# Altium PCB RPIShield_Rev1.PcbDoc
Units mil, origin at the board's own origin, x right, y up, seen from the top; angles counter-clockwise.
Board outline 2585 x 2220 mil, 2 copper layers (Top Layer, Bottom Layer); 27 components, 25 nets, 152 pads, 5 vias.
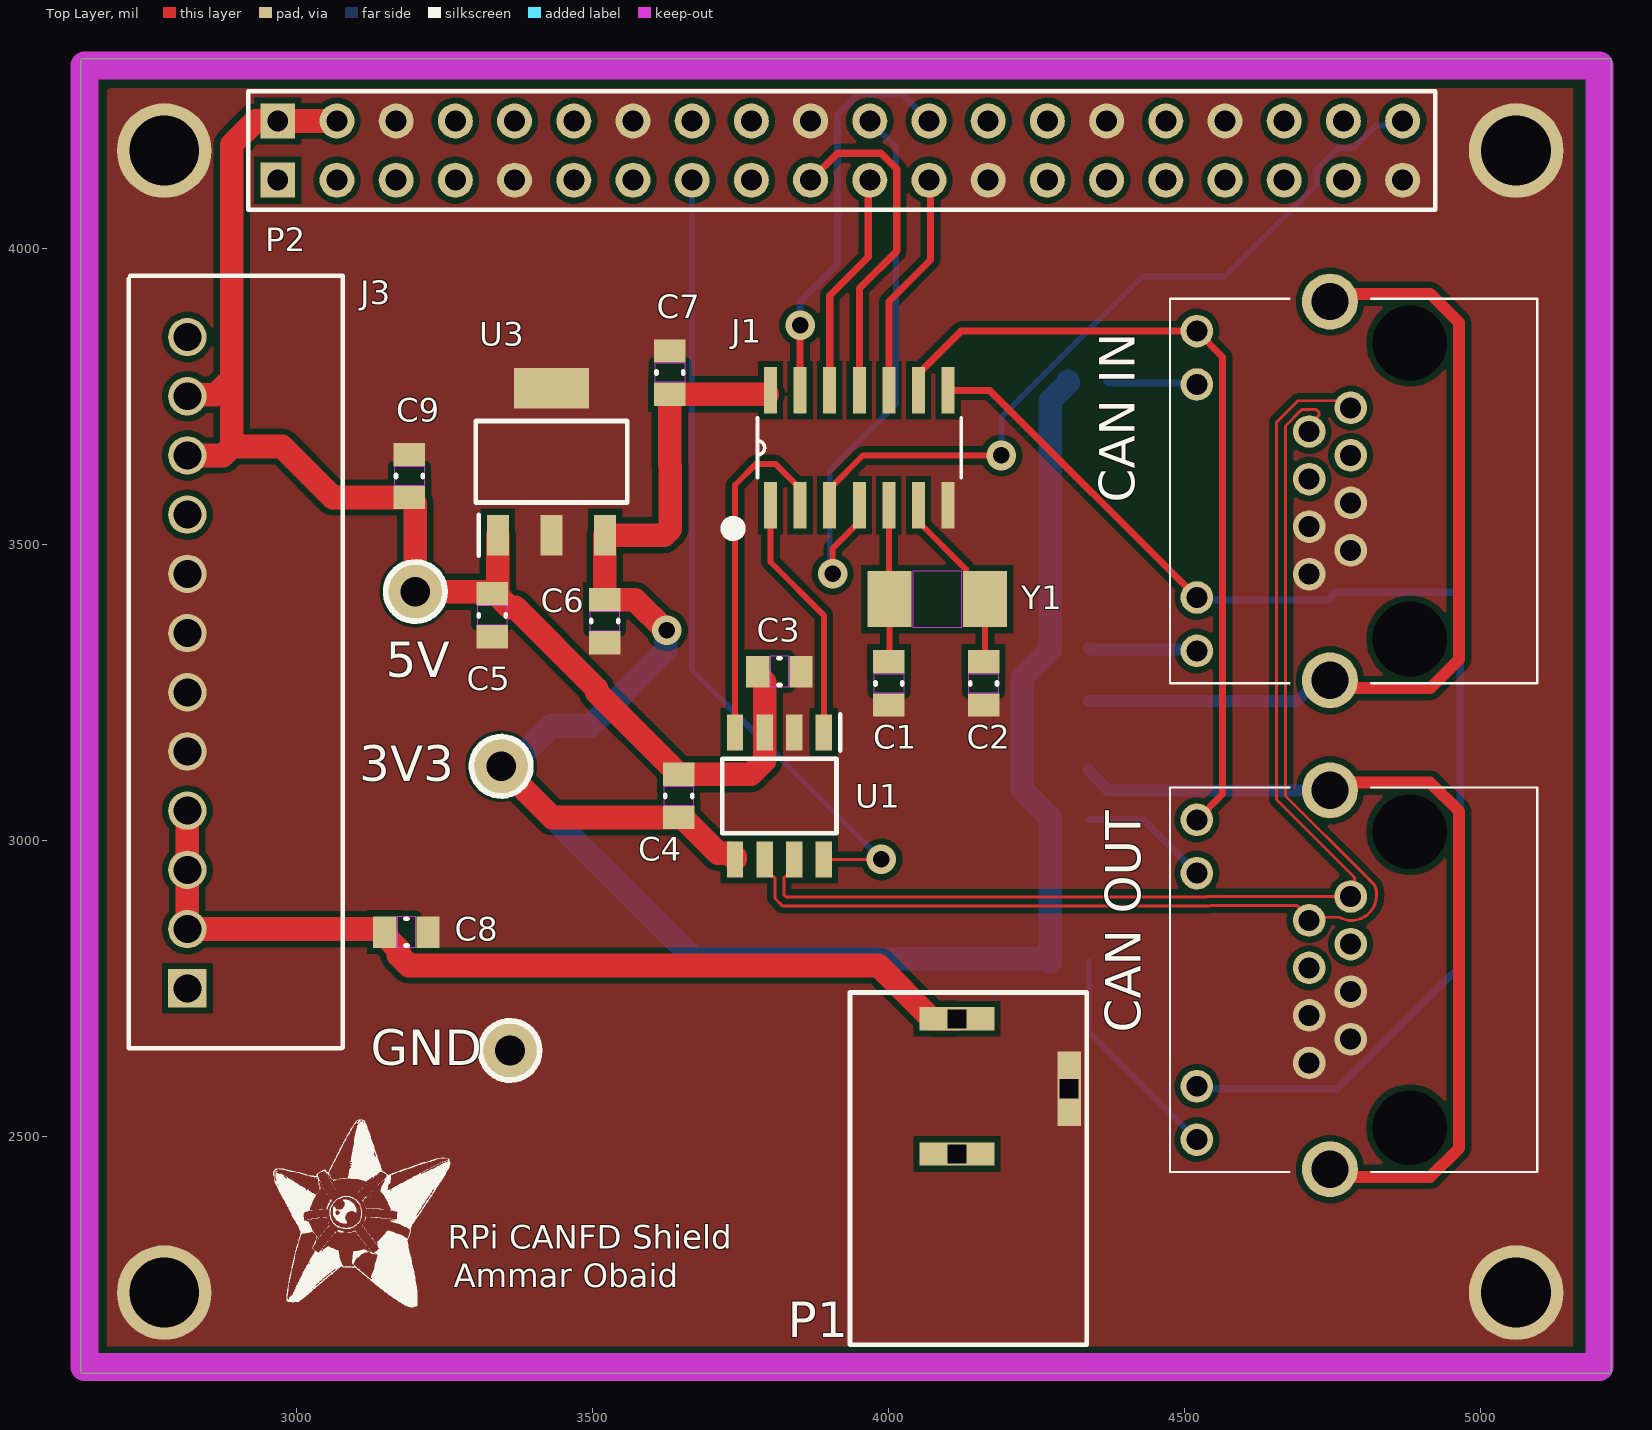
[diagram p0: Top Layer view]
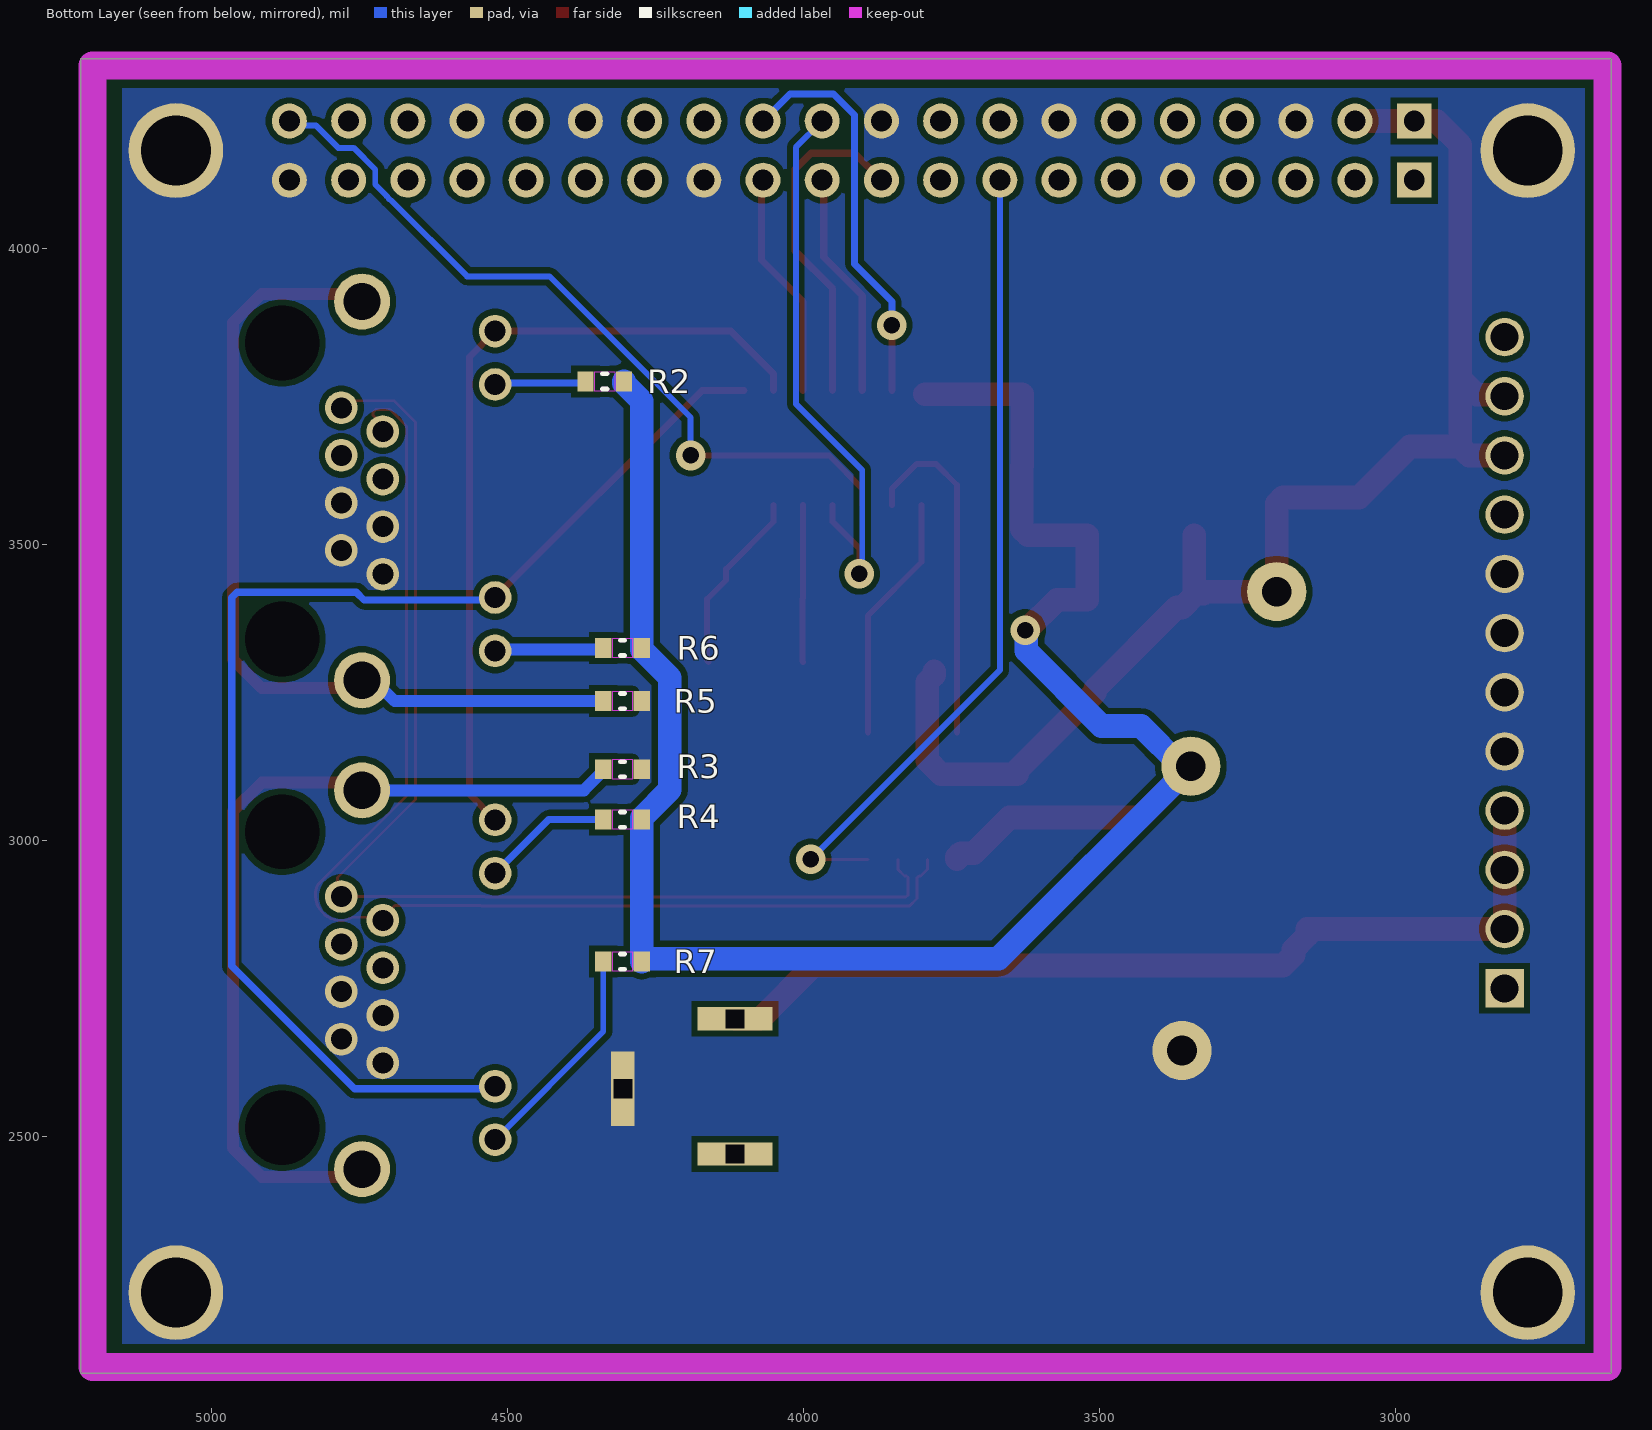
[diagram p1: Bottom Layer view, seen from below]
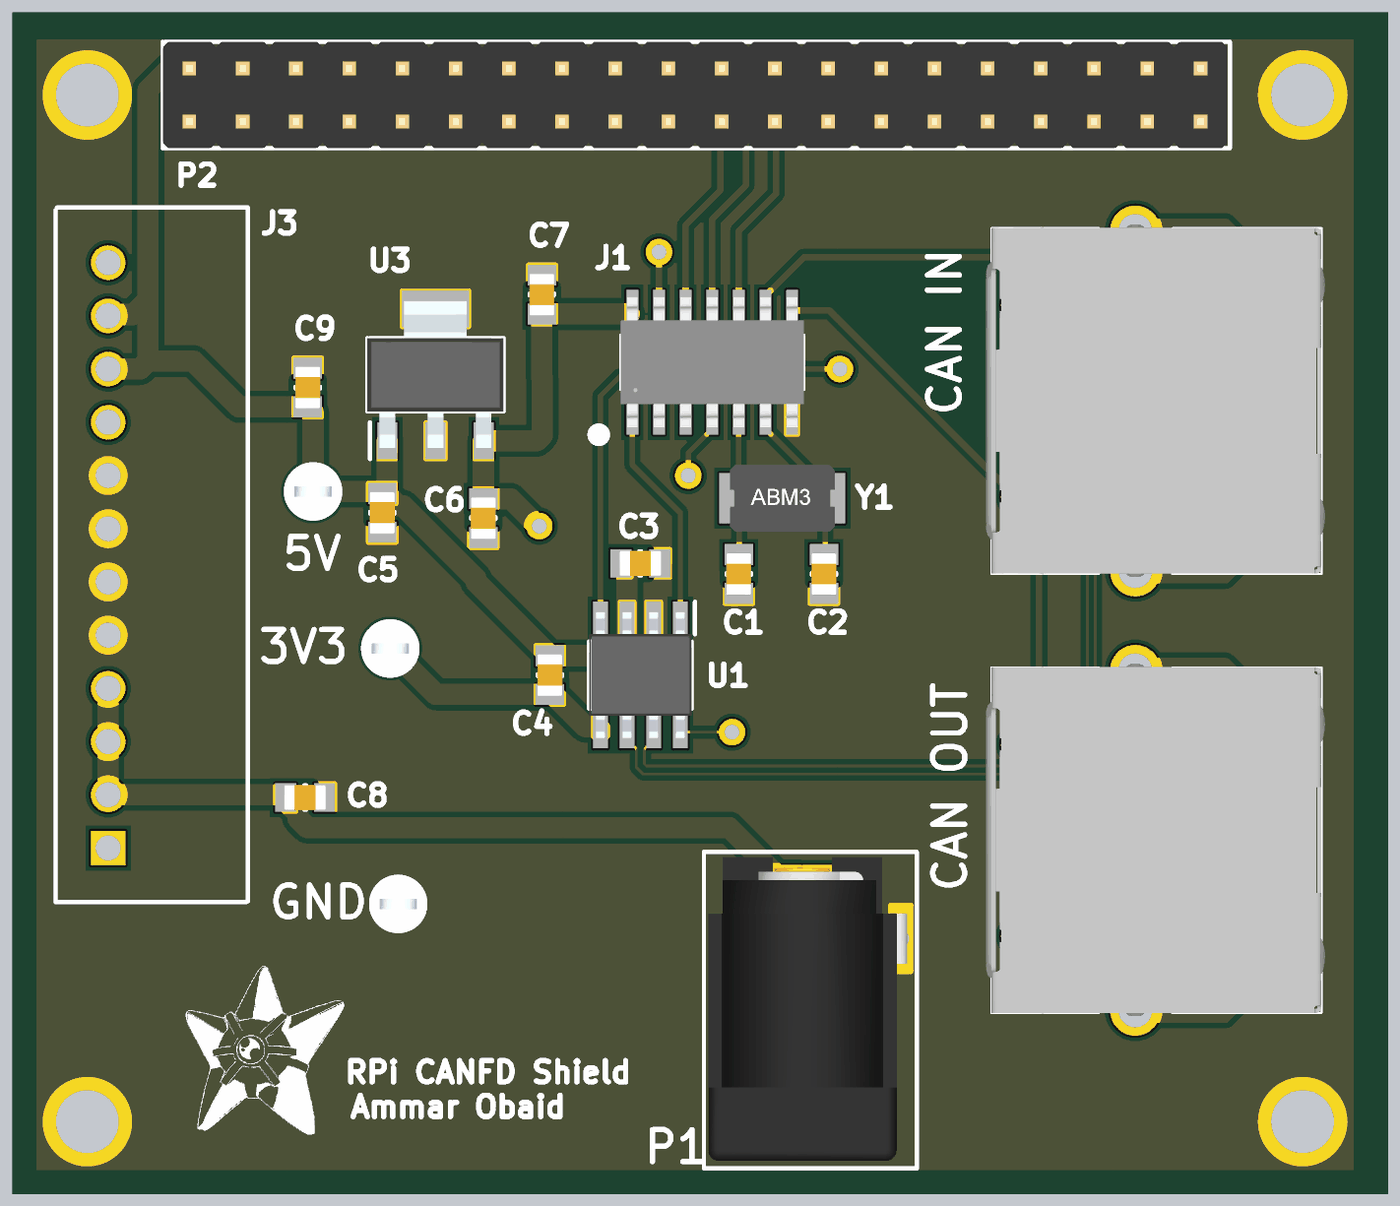
[diagram p2: 3D render of the assembled board from above, using the file's embedded part models]
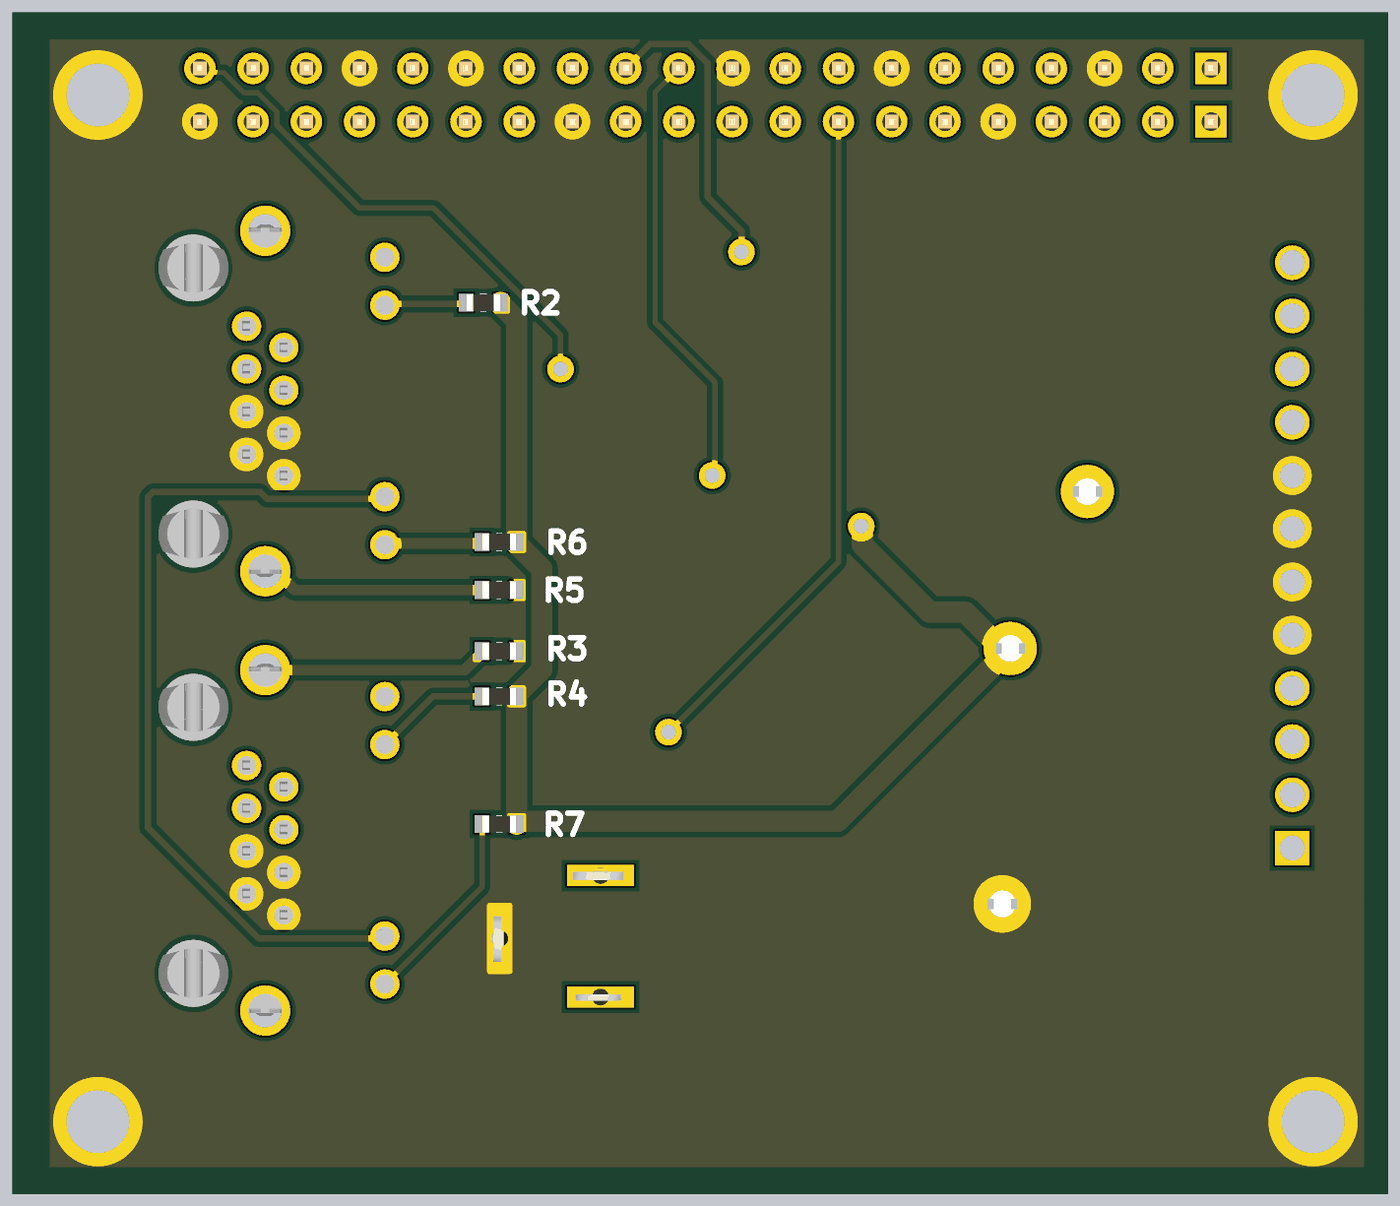
[diagram p3: 3D render of the assembled board from below, using the file's embedded part models]

## Layer stack, top to bottom
Top Solder: solder mask 0.4, Solder Resist, Dk 3.5
Top Layer: signal copper 1.4
Dielectric 1: dielectric 12.6, FR-4, Dk 4.8
Bottom Layer: signal copper 1.4
Bottom Solder: solder mask 0.4, Solder Resist, Dk 3.5

## Board outline
2635,2100 2635,4320 5220,4320 5220,2100

## Design rules (kind name [scope] priority, off if disabled: settings)
Clearance [All] p1: gap=10 ignorepadtopadclearanceinfootprint=FALSE except(0: Arc-Hole Track-Hole SMDPad-Hole THPad-Hole Via-Hole Fill-Hole Poly-Hole Region-Hole Text-Hole)
DiffPairsRouting [All] p1: maxlimit=10 minlimit=10 mostfreqgap=10 toplayer_minwidth=5 toplayer_maxwidth=15 toplayer_prefwidth=15 bottomlayer_minwidth=5 bottomlayer_maxwidth=15 bottomlayer_prefwidth=15 maxuncoupledlength=500
PolygonConnect PolygonConnect_2 [All vs IsNamedPolygon('GND_L02_P004')] p1: connectstyle=Direct reliefconductorwidth=10 reliefentries=4 polygonreliefangle="90 Angle" airgapwidth=10
PolygonConnect Relief_Top [All vs IsNamedPolygon('GND_L01_P005')] p2: connectstyle=Direct reliefconductorwidth=10 reliefentries=4 polygonreliefangle="90 Angle" airgapwidth=10
PolygonConnect PolygonConnect_1 [All vs IsNamedPolygon('GND_L01_P005')] p3: thpad.connectstyle=Direct thpad.reliefconductorwidth=10 thpad.reliefentries=4 thpad.polygonreliefangle="90 Angle" thpad.airgapwidth=10 smdpad.connectstyle=Direct smdpad.reliefconductorwidth=10 smdpad.reliefentries=4 smdpad.polygonreliefangle="90 Angle" smdpad.airgapwidth=10 via.connectstyle=Relief via.reliefconductorwidth=10 via.reliefentries=4 via.polygonreliefangle="90 Angle" via.airgapwidth=10
PolygonConnect [All] p4: connectstyle=Relief reliefconductorwidth=10 reliefentries=4 polygonreliefangle="90 Angle" airgapwidth=10
RoutingVias [All] p1: holewidth=28 width=50 viastyle="Through Hole" minholewidth=28 minwidth=50 maxholewidth=28 maxwidth=50
SolderMaskExpansion [All] p1: expansion=4 istentingtop=FALSE
Width [All] p1: maxlimit=40 minlimit=5 preferedwidth=10 minimp=50.000000 maximp=50.000000 favimp=50.000000
29 further rules are at their usual default settings.

## Classes and differential pairs
differential pair CAN: +CAN_P -CAN_N

## Components (designator, comment, footprint, x,y, rotation, side; value= is the part's Value field where it differs from the comment)
3V3 "Test Point" "Test Point - 5002" 3345,3125 r0 top (schematic designator TP3)
5V "Test Point" "Test Point - 5002" 3200,3420 r0 top (schematic designator TP2)
C1 "Capacitor - Nonpolarized" "0805 - Capacitor" 4000,3265 r90 top value=27pF
C2 "Capacitor - Nonpolarized" "0805 - Capacitor" 4160,3265 r90 top value=27pF
C3 "Capacitor - Nonpolarized" "0805 - Capacitor" 3815,3285 r180 top value=100nF
C4 "Capacitor - Nonpolarized" "0805 - Capacitor" 3645,3075 r270 top value=100nF
C5 "Capacitor - Nonpolarized" "0805 - Capacitor" 3330,3380 r270 top value=1uF
C6 "Capacitor - Nonpolarized" "0805 - Capacitor" 3520,3370 r90 top value=1uF
C7 "Capacitor - Nonpolarized" "0805 - Capacitor" 3630,3790 r270 top value=100nF
C8 "Capacitor - Nonpolarized" "0805 - Capacitor" 3185,2845 r0 top value=10uF
C9 "Capacitor - Nonpolarized" "0805 - Capacitor" 3190,3615.32 r270 top value=22uF
"CAN IN" "MTJ-88ARX1-FSM-LV" MTJ-88ARX1-FSM-LV 4790,3600.55 r90 top (schematic designator *1)
"CAN OUT" "MTJ-88ARX1-FSM-LV" MTJ-88ARX1-FSM-LV 4790,2775 r90 top (schematic designator *)
GND "Test Point" "Test Point - 5002" 3360,2645 r0 top (schematic designator TP1)
J1 "MCP2517FD" MCP2517FD 3955.67,3668.35 r90 top
J3 "K7805-3AR3" K7805-3AR3 2815,2750 r90 top
P1 "694106301002 Barrel Connector" 694106301002 4115,2698.35 r90 top
P2 "2x20 Header" HDR2X20 2967.68,4115 r0 top
R2 "Resistor" "0603 - Resistor" 4335,3775 r180 bottom value=230
R3 "Resistor" "0603 - Resistor" 4305,3120 r0 bottom value=DNP
R4 "Resistor" "0603 - Resistor" 4305,3035 r180 bottom value=230
R5 "Resistor" "0603 - Resistor" 4305,3235 r0 bottom value=DNP
R6 "Resistor" "0603 - Resistor" 4305,3325 r180 bottom value=230
R7 "Resistor" "0603 - Resistor" 4305,2795 r180 bottom value=230
U1 "TJA1051T_3,118" "TJA1051T/3,118 - duplicate" 3815,3075 r270 top
U3 "MCP1755" MCP1755ST 3268.58,3420.83 r90 top
Y1 "Oscillator" "2-SMD NO LEAD CRSYSTAL" 4081.65,3407.24 r0 top value=16MHz

## Footprints (in the part's own frame and the unit in brackets; to place one, negate y for a bottom-side part, rotate by r counter-clockwise, add the part's x,y. Pads: shape width x height; smd on the part's side, far side on the other; paste and mask are expansions set on the pad)
"2-SMD NO LEAD CRSYSTAL" [mm]
  rect 1.9x2.4 smd: 1(-2.05,0) 2(2.05,0)
  Top Layer keep-out region: -1.05,1.2 -1.05,-1.2 1.05,-1.2 1.05,1.2
  body extent -2.5,-1.6 2.5,1.6, height 1.3
"0603 - Resistor" [mm] "0603 Chip Resistor - IPC Medium Density"
  rect 0.7x0.85 smd: 1(-0.825,0) 2(0.825,0)
  Top Layer keep-out region: -0.45,0.4 -0.45,-0.4 0.45,-0.4 0.45,0.4
  silkscreen extent -0.1,-0.33 0.1,0.33, body extent -0.8,-0.4 0.8,0.4, height 0.45
"0805 - Capacitor" [mm] "0805 Chip Capacitor - IPC Medium Density"
  rect 1x1.35 smd: 1(-0.925,0) 2(0.925,0)
  Top Layer keep-out region: -0.4,0.65 -0.4,-0.65 0.4,-0.65 0.4,0.65
  silkscreen extent -0.05,-0.58 0.05,0.58, body extent -1,-0.6 1,0.6, height 1.2
694106301002 [mm] "Power Barrel Connector Jack 2.10mm ID (0.083\"), 5.50mm OD (0.217\") Through Hole, Right Angle"
  rect 1x3.2 hole 0.8 square: 1(0,0) 2(-5.8,0)
  rect 3.2x1 hole 0.8 square: 3(-3,-4.809)
  silkscreen extent -13.98,-5.57 1.13,4.59, body extent -13.62,-5.11 0.88,4.39, height 13.35
HDR2X20 [mm] "Connector; Header; 40 Position"
  rect 1.5x1.5 hole 0.9: 1(0,0) 40(0,2.54)
  round 1.5 hole 0.9: 2(2.54,0) 3(5.08,0) 4(7.62,0) 5(10.16,0) 6(12.7,0) 7(15.24,0) 8(17.78,0) 9(20.32,0) 10(22.86,0) 11(25.4,0) 12(27.94,0) 13(30.48,0) 14(33.02,0) 15(35.56,0) 16(38.1,0) 17(40.64,0) 18(43.18,0) 19(45.72,0) 20(48.26,0) 21(48.26,2.54) 22(45.72,2.54) 23(43.18,2.54) 24(40.64,2.54) 25(38.1,2.54) 26(35.56,2.54) 27(33.02,2.54) 28(30.48,2.54) 29(27.94,2.54) 30(25.4,2.54) 31(22.86,2.54) 32(20.32,2.54) 33(17.78,2.54) 34(15.24,2.54) 35(12.7,2.54) 36(10.16,2.54) 37(7.62,2.54) 38(5.08,2.54) 39(2.54,2.54)
  silkscreen extent -1.27,-1.27 49.66,3.81, body extent -1.27,-1.27 49.53,3.81, height 8.54
K7805-3AR3 [mm] "Non-Isolated PoL Module DC DC Converter 1 Output 5V 3A 8V - 36V Input"
  rect 1.65x1.65 hole 1.2: 1(0,0)
  round 1.65 hole 1.2: 2(2.54,0) 3(5.08,0) 4(7.62,0) 5(10.16,0) 6(12.7,0) 7(15.24,0) 8(17.78,0) 9(20.32,0) 10(22.86,0) 11(25.4,0) 12(27.94,0)
  silkscreen extent -2.58,-6.67 30.57,2.51
MCP1755ST [mm] "Load Drop Voltage Regulator"
  rect 1.75x0.95 smd: 1(2.4,-1.8) 2(2.4,-4.1) 3(2.4,-6.4)
  rect 1.75x3.2 smd: 2(8.7,-4.1)
  silkscreen extent 1.52,-7.35 7.3,-0.85, body extent 2.05,-7.35 9.05,-0.85, height 1.8
MCP2517FD [mil] "CANbus Controller CAN 2.0 SPI Interface 14-SOIC"
  rect 78x22 smd: 1(-102.35,155.67) 2(-102.35,105.67) 3(-102.35,55.67) 4(-102.35,5.67) 5(-102.35,-44.33) 6(-102.35,-94.33) 7(-102.35,-144.33) 8(91.65,-144.33) 9(91.65,-94.33) 10(91.65,-44.33) 11(91.65,5.67) 12(91.65,55.67) 13(91.65,105.67) 14(91.65,155.67)
  silkscreen extent -152,-166 46,229, body extent -127,-166 117,178, height 69
MTJ-88ARX1-FSM-LV [mm] "RJ45 Connector"
  round 1.4 hole 0.9: 1(3.302,0.254) 2(2.282,2.034) 3(1.262,0.254) 4(0.242,2.034) 5(-0.778,0.254) 6(-1.798,2.034) 7(-2.818,0.254) 8(-3.838,2.034) 9(6.592,6.854) 10(4.302,6.854) 11(-4.838,6.854) 12(-7.128,6.854)
  round 2.4 hole 1.6: MH1(7.857,1.144) MH2(-8.393,1.144)
  round 1.6 hole 3.2 unplated: MH3(6.082,-2.286) MH4(-6.618,-2.286)
  silkscreen extent -8.52,-7.75 7.98,8, body extent -8.65,-7.91 8.15,8.26, height 12.95
"Test Point - 5002" [mil] "5002 - PCB TEST POINT WHITE .040"
  round 100 hole 50: 1(0,0)
  silkscreen extent -50,-50 50,50, body extent -50,-50 50,50, height 180
"TJA1051T/3,118 - duplicate" [mm] "SOIC127P600X175-8N"
  rect 1.55x0.7 smd: 1(-2.725,1.905) 2(-2.725,0.635) 3(-2.725,-0.635) 4(-2.725,-1.905) 5(2.725,-1.905) 6(2.725,-0.635) 7(2.725,0.635) 8(2.725,1.905)
  silkscreen extent -3.5,-2.45 1.6,2.61, body extent -3,-2.45 3,2.45, height 1.75

## Part data
C1 C2: "Nonpolarized Capacitor", Manufacturer=Yageo, Manufacturer Part Number=CC0805JRNPO9BN270, Supplier Part Number=311-1104-1-ND, Supplier=Digikey
C3 C4 C7: "Nonpolarized Capacitor", Manufacturer=Yageo, Manufacturer Part Number=CC0805KRX7R8BB104, Supplier Part Number=311-1141-1-ND, Supplier=Digikey
C5 C6 C8 C9: "Nonpolarized Capacitor", Manufacturer=Yageo, Manufacturer Part Number=CC0805KFX7R6BB106, Supplier Part Number=13-CC0805KFX7R6BB106CT-ND, Supplier=Digikey
"CAN IN" "CAN OUT": "RJ45 Connector"
J1: "CANbus Controller CAN 2.0 SPI Interface 14-SOIC", Manufacturer Name="Microchip Technology", Manufacturer Part Number=MCP2517FDT-H/SL, Supplier Part Number=MCP2517FDT-H/SLTR-ND, Datasheet=https://ww1.microchip.com/downloads/en/DeviceDoc/MCP2517FD-External-CAN-FD-Controller-with-SPI-Interface-20005688B.pdf, Supplier=Digikey
J3: "Non-Isolated PoL Module DC DC Converter 1 Output 5V 3A 8V - 36V Input", Manufacturer Name="Mornsun America, LLC", Supplier Part Number=2725-K7805-3AR3-ND, Datasheet=https://www.mornsun-power.com/html/pdf/K7803-3AR3.html, Manufacturer Part Number=K7805-3AR3, Supplier=Digikey
P1: "CONN PWR JACK 2.1X5.5MM SOLDER", Manufacturer="Würth Elektronik", Manufacturer Part Number=694106301002, Supplier Part Number=732-5930-ND, Datasheet=https://www.we-online.com/katalog/datasheet/6941xx301002.pdf, Supplier=Digikey
P2: "2x20 Pin Header"
R2 R3 R4 R5 R6 R7: Manufacturer=Yageo, Manufacturer Part Number=RC0603FR-0710KL, Supplier Part Number=311-10.0KHRCT-ND, Supplier=Digikey
U1: "CAN Transceiver IC 4.5V-5.5V 250ns", Manufacturer=NXP, Manufacturer Part Number=TJA1051T/3,118, Supplier Part Number=568-8684-1-ND, ComponentLink1Description=Datasheet, ComponentLink1URL=http://www.nxp.com/docs/en/data-sheet/TJA1051.pdf, Supplier=Digikey
U3: library part MCP1755ST, "Linear Regulator 300mA", Manufacturer=Microchip, ComponentLink1Description=Datasheet, ComponentLink1URL=http://ww1.microchip.com/downloads/en/devicedoc/25160a.pdf, Supplier=Digikey
Y1: "Crystal Oscillator", Manufacturer="Abracon LLC", Manufacturer Part Number=ABM7-16.000MHZ-4-T, Supplier Part Number=535-13460-1-ND, Supplier=Digikey

## Free pads (board coordinates)
  round 160 hole 118.11: ""(2775.94,2235.87) ""(2775.94,4165) ""(5059.41,2235.87) ""(5059.41,4165)

## Via types
v1: diameter 50, hole 28, Top Layer to Bottom Layer, 5 vias

## Nets (pads, with @x,y where several pads share a name; then routed paths per layer and width w, separated by ;. In a path a pad name is that pad's centre, name@x,y a point inside that pad or via, vN(x,y) a via of type N, cw(c..) or ccw(c..) an arc to the next point about the centre after c; other vN are vias at no path point)
+3.3V: 3V3.1 C4.2 C6.2 C7.2 J1.14 R2.2 R4.2 R6.2 R7.2 U1.5 U3.3 | length 3695.3
  Top Layer w40: 3V3.1 3431.42,3038.58 C4.2 3651.26,3038.58 3711.61,2978.23 3733.78,2978.23 3740,2972.01 U1.5 ; v1(3625,3355) 3622.29,3355 3571.19,3406.1 3520.31,3406.1 C6.2 3520,3514.76 U3.3 3620.32,3515.32 3630.86,3525.86 3630.86,3631.95 3630,3632.81 C7.2 J1.14@3794,3753.58
  Bottom Layer w40: v1(3625,3355) 3623.09,3353.09 3623.09,3320.3 3495.83,3193.05 3429.28,3193.05 3361.24,3125 3V3.1 3670,2800 4267.52,2800 R7.2 R4.2 4272.52,3037.95 4225,3085.47 4225,3274.53 4272.52,3322.05 R6.2 4272.52,3742.05 4302.52,3772.05 R2.2
+5V: 5V.1 C3.2 C4.1 C5.1 C9.2 J3.10 J3.11 P2.39 P2.40 U1.3 U3.1 | length 2354.7
  Top Layer w40: J3.10 2875,3650 2890,3665 ; J3.11 2817.48,3752.48 2862.48,3752.48 2890,3780 ; P2.39 P2.40 2930,4215 2890,4175 2890,3780 ; U3.1 3339.45,3419.61 C5.1@3336.26,3416.42 ; C4.1 3638.74,3111.42 3638.43,3111.73 3638.43,3117.99 3506.24,3250.18 3506.24,3256.03 3369,3393.27 3359.41,3393.27 C5.1@3336.26,3416.42 ; C4.1@3651.57,3111.42 3766.57,3111.42 3790,3134.85 3790,3267.32 3778.58,3278.74 C3.2 ; 2890,3665 2975,3665 3061.1,3578.9 C9.2 3200,3568.9 5V.1 3320.16,3420 3323.74,3416.42 C5.1 C5.1@3336.26,3416.42 ; 2890,3665 2890,3780
+21.1V: C8.1 J3.2 J3.3 J3.4 P1.1 | length 1574.8
  Top Layer w40: J3.4 J3.3 J3.2 3148.27,2850 3148.58,2849.69 C8.1 3148.58,2838.74 3171.73,2815.59 3171.73,2806 3189.31,2788.43 3982.24,2788.43 4072.32,2698.35 P1.1
\I\N\T\: J1.4 P2.30 | length 966.6
  Top Layer w10: v1(3905,3450) 3905,3493 3950,3538 J1.4
  Bottom Layer w10: v1(3905,3450) 3900,3455 3900,3625 4012.2,3737.2 4012.2,4170.47 P2.30
C\S\: J1.13 P2.29 | length 679.2
  Top Layer w12: J1.13 v1(3850,3870)
  Bottom Layer w12: v1(3850,3870) 3850,3910 3913.2,3973.2 3913.2,4224.91 3948.82,4260.53 4022.15,4260.53 P2.29
CAN_G_LED: "CAN IN.11" "CAN OUT.11" J1.8 | length 2175.7
  Top Layer w12: J1.8 4170.24,3760 4520.16,3410.08
  Bottom Layer w12: 4520.16,2584.53 4524.35,2580.34 4757.89,2580.34 4965,2787.45 4965,3410 4956.01,3418.99 4754.59,3418.99 4741.49,3405.89 4524.35,3405.89 4520.16,3410.08
CAN_N: "CAN IN.2" "CAN OUT.2" U1.6 | length 2102.3
  Top Layer w5: U1.6 3790,2950.98 3801.28,2939.7 3804.57,2939.7 3807.5,2936.78 3807.5,2901.72 3819.9,2889.31 4542.96,2889.31 4543.65,2890 4689.64,2890 4709.66,2869.98 4715.06,2869.98 ; 4709.92,2864.84 4715.06,2869.98 ; 4709.92,3690.39 4709.92,3701.59 4726.71,3718.38 4726.71,3722.52 4721.79,3727.44 4697.39,3727.44 4669.86,3699.92 4669.86,3074.94 4801.41,2943.39 ; 4801.43,2943.37 4819.71,2925.09 cw(c4781.19,2907.14) 4821.75,2919.82 cw(c4781.19,2907.14) 4784.03,2864.73 cw(c4781.19,2907.14) 4782.87,2864.67 cw(c4782.69,2869.66) 4782.46,2864.67 ccw(c4780,2824.68) 4778.72,2864.72 cw(c4778.6,2869.72) 4778.31,2864.73 cw(c4781.19,2907.14) 4777.13,2864.83 cw(c4781.19,2907.14) 4760.55,2869.98 4715.06,2869.98
CAN_P: "CAN IN.1" "CAN OUT.1" U1.7 | length 2031.7
  Top Layer w5: U1.7 3840,2950.98 3828.72,2939.7 3825.43,2939.7 3822.5,2936.78 3822.5,2907.93 3826.12,2904.31 4536.75,2904.31 4537.44,2905 4780,2905 4786.46,2911.46 4786.46,2937.13 4654.86,3068.72 4654.86,3706.13 4691.18,3742.44 4754.55,3742.44 4766.44,3730.55 4780,3730.55
CAN_Y_LED: "CAN IN.9" "CAN OUT.9" J1.9 | length 1389.7
  Top Layer w12: J1.9 4050,3788 4122.08,3860.08 4520.16,3860.08 4563.72,3816.52 4563.72,3078.09 4520.16,3034.53
CANRX: J1.2 U1.4 | length 587.9
  Top Layer w10: U1.4 3740,3600 3775.86,3635.86 3808.14,3635.86 3850,3594 J1.2
CANTX: J1.1 U1.1 | length 421
  Top Layer w10: J1.1 3800,3470 3890,3380 U1.1
CLKOUT: J1.3 P2.21 | length 1305.4
  Top Layer w10: J1.3 3900,3594 3956,3650 v1(4190,3650)
  Bottom Layer w10: v1(4190,3650) 4190,3714.21 4428.28,3952.49 4567.49,3952.49 4694.33,4079.33 ccw(c4667.68,4115) 4703.35,4088.35 4722.68,4107.68 4722.68,4132.97 4759.23,4169.53 4785.18,4169.53 4823.15,4207.5 4860.18,4207.5 P2.21
GND: "CAN IN.5" "CAN IN.6" "CAN IN.7" "CAN IN.8" "CAN OUT.5" "CAN OUT.6" "CAN OUT.7" "CAN OUT.8" C1.1 C2.1 C3.1 C5.2 C6.1 C7.1 C8.2 C9.1 GND.1 J1.7 J3.5 J3.6 J3.7 J3.8 P1.3 P2.5 P2.13 P2.20 P2.24 P2.26 P2.31 P2.34 P2.38 pad. R3.1 R5.1 U1.2 U3.2
MISO: J1.12 P2.11 | length 383
  Top Layer w12: J1.12 3900,3920 3965,3985 3965,4112.32 P2.11
MOSI: J1.11 P2.10 | length 575.5
  Top Layer w12: P2.10 3913.2,4160.53 3986.54,4160.53 4013.2,4133.86 4013.2,3995.03 3950,3931.83 J1.11
Net*1_10: "CAN IN.10" R2.1 | length 158.1
  Bottom Layer w12: R2.1@4369.82,3777.34 R2.1 4370.02,3772.46 4517.62,3772.46 4520.16,3769.92
Net*1_12: "CAN IN.12" R6.1 | length 184.8
  Bottom Layer w20: R6.1 4340.02,3322.46 4517.62,3322.46 4520.16,3319.92
Net*1_MH1: "CAN IN.MH1" "CAN IN.MH2" R5.2 | length 1478
  Top Layer w20: 4744.96,3270.12 4758.07,3257.01 4914.38,3257.01 4962.99,3305.62 4962.99,3874.38 4914.38,3922.99 4758.07,3922.99 4744.96,3909.88
  Bottom Layer w20: R5.2 4689.69,3235 4724.8,3270.12 4744.96,3270.12
Net*_10: "CAN OUT.10" R4.1 | length 220.2
  Bottom Layer w12: R4.1 4429.53,3035 4520.16,2944.37
Net*_12: "CAN OUT.12" R7.1 | length 376.3
  Bottom Layer w10: R7.1 4337.48,2677.05 4520.16,2494.37
Net*_MH1: "CAN OUT.MH1" "CAN OUT.MH2" R3.2 | length 1479.9
  Top Layer w20: 4744.96,2444.57 4758.07,2431.46 4914.38,2431.46 4962.99,2480.07 4962.99,3048.83 4914.38,3097.44 4758.07,3097.44 4744.96,3084.33
  Bottom Layer w20: R3.2 4337.48,3117.05 4370.2,3084.33 4744.96,3084.33
OSCIN: C2.2 J1.6 Y1.2 | length 312.1
  Top Layer w10: J1.6 4050,3538 4129.96,3458.04 4129.96,3439.65 Y1.2 4162.36,3303.78 C2.2
OSCOUT: C1.2 J1.5 Y1.1 | length 265.4
  Top Layer w10: C1.2 4000.94,3302.36 Y1.1 4000,3408.19 J1.5
SCK: J1.10 P2.12 | length 385
  Top Layer w12: J1.10 4000,3910 4070,3980 4070,4112.68 P2.12
STANDBY: P2.8 U1.8 | length 1380.8
  Top Layer w5: U1.8 v1(3987.28,2967.72) v1@3990,2965
  Bottom Layer w10: P2.8 3667.68,3287.32 v1(3987.28,2967.72)
pads on no net: "CAN IN.3" "CAN IN.4" "CAN IN.MH3" "CAN IN.MH4" "CAN OUT.3" "CAN OUT.4" "CAN OUT.MH3" "CAN OUT.MH4" J3.1 J3.9 J3.12 P1.2 P2.1 P2.2 P2.3 P2.4 P2.6 P2.7 P2.9 P2.14 P2.15 P2.16 P2.17 P2.18 P2.19 P2.22 P2.23 P2.25 P2.27 P2.28 P2.32 P2.33 P2.35 P2.36 P2.37

## Polygon pours and split planes (outlines as drawn)
GND on Top Layer "GND_L01_P005" (solid, remove dead copper, pour order 5): 2685,4270 5155,4270 5155,2145 2680,2145 2680,4275
GND on Bottom Layer "GND_L02_P004" (solid, remove dead copper, pour order 4): 5150,4270 5150,2150 2680,2150 2680,4270

## Keep-outs
Keep-Out Layer:
  lines w47.24: 2640.94,2110 5200,2110 5200,4308.82 2640.94,4308.82 2640.94,2110

## Silkscreen, mask and mechanical layers (free items; w line width, h text height)
Top Overlay:
  drawing of 10 lines, arcs and shapes, not listed
  text "RPi CANFD Shield" at 3255,2310 h40
  text "Ammar Obaid" at 3265,2245 h40